# EAGLE board ClockGenerator (EAGLE 6.1)
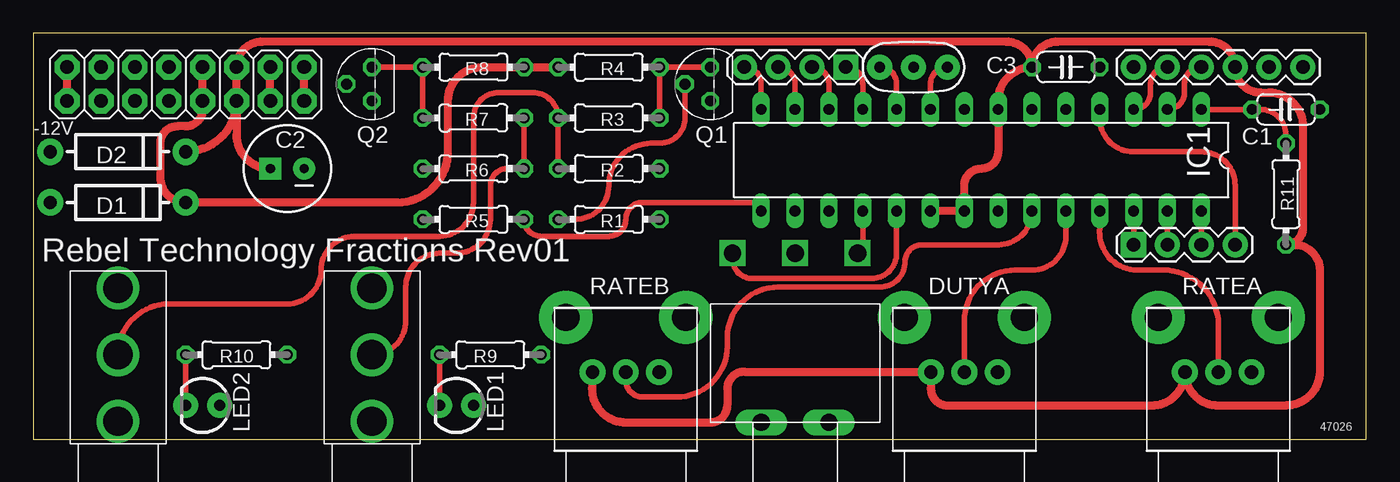
[diagram p0: board, top side]
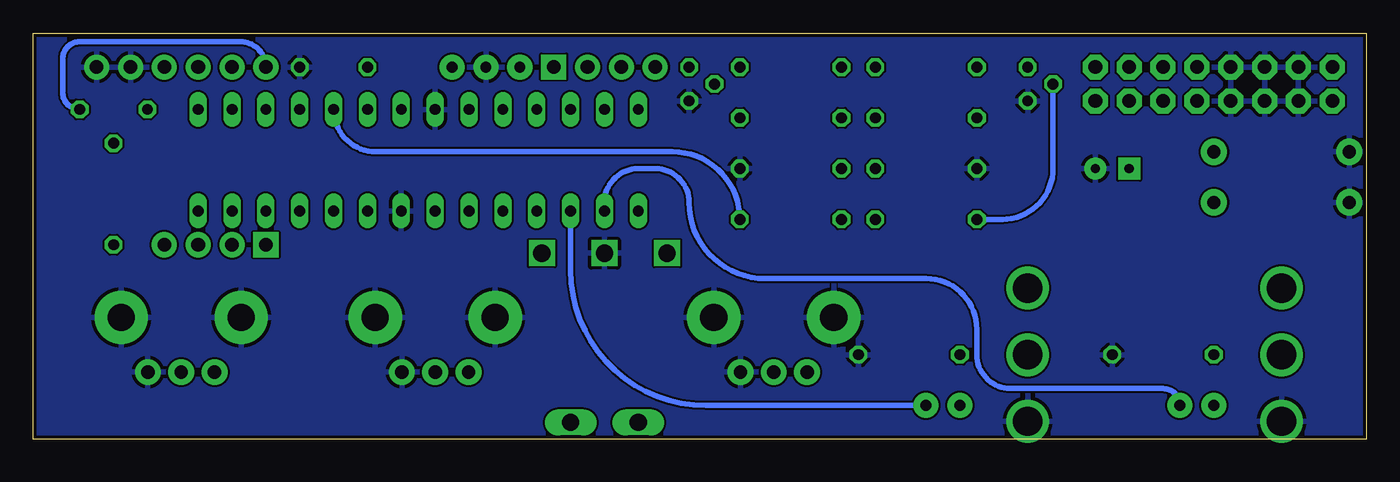
[diagram p1: board, bottom side, seen from below]

Size 100 x 30.48 mm. Coordinates in mm from the lower left corner, seen from the top.
Outline: 0,0 100,0 100,30.48 0,30.48 0,0
Copper layers (1*16): Top 0.035mm / dielectric 1.5mm / Bottom 0.035mm
Design rules: minimum track width 6mil, minimum drill 12mil, track to track 6mil, track to pad 6mil, pad to pad 6mil, via to via 6mil, smd to smd 0mil, copper to edge 10mil, drill to drill 10mil, minimum pad ring 10mil, minimum via ring 6mil, stop-mask expansion 2mil, vias tented up to drill 100mil, thermal gap 10mil

## Footprints (pad centres in the part's own frame; a part is rotated, then mirrored left to right if it is on the bottom)
C050-024X044 = drill 0.813 octagon: 1 -2.54,0; 2 2.54,0
CPOL-RADIAL-100UF-25V = drill 0.7 pad 1.651 square: 1 1.27,0 | drill 0.7 pad 1.651: 2 -1.27,0
DIODE-1N4001 = drill 1 pad 1.981: A -5.08,0; C 5.08,0
POT-ALPS_RK09L1120 = drill 1 pad 1.93: 1 -2.5,-0.036; 2 0,-0.036; 3 2.5,-0.036 | drill 2.032 pad 4: SHLD1 -4.5,4.064; SHLD2 4.5,4.064
DIL28-3 = drill 0.813 long: 1 -16.51,-3.81; 2 -13.97,-3.81; 3 -11.43,-3.81; 4 -8.89,-3.81; 5 -6.35,-3.81; 6 -3.81,-3.81; 7 -1.27,-3.81; 8 1.27,-3.81; 9 3.81,-3.81; 10 6.35,-3.81; 11 8.89,-3.81; 12 11.43,-3.81; 13 13.97,-3.81; 14 16.51,-3.81; 15 16.51,3.81; 16 13.97,3.81; 17 11.43,3.81; 18 8.89,3.81; 19 6.35,3.81; 20 3.81,3.81; 21 1.27,3.81; 22 -1.27,3.81; 23 -3.81,3.81; 24 -6.35,3.81; 25 -8.89,3.81; 26 -11.43,3.81; 27 -13.97,3.81; 28 -16.51,3.81
1X06 = drill 1.016 pad 1.88: 1 0,0; 2 2.54,0; 3 5.08,0; 4 7.62,0; 5 10.16,0; 6 12.7,0
1X04 = drill 1.016 pad 1.88 square: 1 0,0 | drill 1.016 pad 1.88: 2 2.54,0; 3 5.08,0; 4 7.62,0
LED3MM = drill 0.813 pad 1.88: A -1.27,0; K 1.27,0
UJ-3502-R = drill 2.2: P$1 0,0; P$2 0,5; P$3 0,-5
TO92 = drill 0.813 octagon: 1 1.27,0; 2 0,1.905; 3 -1.27,0
0204/7 = drill 0.813 octagon: 1 -3.81,0; 2 3.81,0
SWITCH-SPDT-SALECOM-T8020 = drill 1.3 square: 1 -4.699,0; 2 0,0; 3 4.699,0 | drill 1.3 long: SHIELD1 -2.54,-12.7; SHIELD2 2.54,-12.7
2X8 = drill 1.016 pad 1.88 octagon: 1 0,0; 2 0,2.54; 3 2.54,0; 4 2.54,2.54; 5 5.08,0; 6 5.08,2.54; 7 7.62,0; 8 7.62,2.54; 9 10.16,0; 10 10.16,2.54; 11 12.7,0; 12 12.7,2.54; 13 15.24,0; 14 15.24,2.54; 15 17.78,0; 16 17.78,2.54
RESONATOR-PTH = drill 0.8 pad 1.88: 1 -2.54,0; 2 0,0; 3 2.54,0

## Placement (x,y rotation side)
C1  100n  [C050-024X044]  93.98,24.77 180 top
C2  100u  [CPOL-RADIAL-100UF-25V]  19.05,20.32 180 top
C3  100n  [C050-024X044]  77.47,27.94 0 top
D1  [DIODE-1N4001]  6.35,17.78 0 top
D2  [DIODE-1N4001]  6.35,21.59 0 top
DUTYA  POT-ALPS_RK09L  [POT-ALPS_RK09L1120]  69.85,5.08 0 top
IC1  MEGA168  [DIL28-3]  71.12,20.95 180 top
JP1  [1X06]  95.25,27.94 180 top
JP2  [1X04]  60.96,27.94 180 top
JP3  [1X04]  82.55,14.61 0 top
LED1  [LED3MM]  31.75,2.54 180 top
LED2  [LED3MM]  12.7,2.54 180 top
OUTA  JACK-UJ-3502-R  [UJ-3502-R]  25.4,6.35 0 top
OUTB  JACK-UJ-3502-R  [UJ-3502-R]  6.35,6.35 0 top
Q1  2N3904  [TO92]  50.8,26.67 90 top
Q2  2N3904  [TO92]  25.4,26.67 90 top
R1  1K  [0204/7]  43.18,16.51 180 top
R2  1K  [0204/7]  43.18,20.32 180 top
R3  100  [0204/7]  43.18,24.13 180 top
R4  1K  [0204/7]  43.18,27.94 0 top
R5  1K  [0204/7]  33.02,16.51 180 top
R6  1K  [0204/7]  33.02,20.32 0 top
R7  100  [0204/7]  33.02,24.13 0 top
R8  1K  [0204/7]  33.02,27.94 180 top
R9  1K  [0204/7]  34.29,6.35 0 top
R10  1K  [0204/7]  15.24,6.35 0 top
R11  10K  [0204/7]  93.98,18.41 270 top
RATEA  POT-ALPS_RK09L  [POT-ALPS_RK09L1120]  88.9,5.08 0 top
RATEB  POT-ALPS_RK09L  [POT-ALPS_RK09L1120]  44.45,5.08 0 top
SW1  SWITCH-TOGGLE  [SWITCH-SPDT-SALECOM-T8020]  57.15,13.97 0 top
U$2  M08X2  [2X8]  2.54,25.4 0 top
Y1  16Mhz  [RESONATOR-PTH]  66.04,27.94 180 top

## Library data of the parts
C1 C3 R1-R11 = rcl
C2 D1 D2 JP1-JP3 LED1 LED2 U$2 Y1 = SparkFun
DUTYA OUTA OUTB RATEA RATEB SW1 = Rebel
IC1 = atmel; OC_FARNELL: unknown; OC_NEWARK: unknown
Q1 Q2 = transistor-npn

## Nets
+5V: C2.1 C3.1 D2.C DUTYA.1 IC1.7 IC1.20 IC1.21 JP1.3 R11.2 RATEA.1 RATEB.1 U$2.11 U$2.12
+12V: D1.C R4.1 R8.1 U$2.9 U$2.10
ADC0: IC1.23 RATEB.2
ADC1: DUTYA.2 IC1.24
ADC2: IC1.25 RATEA.2
GND: C2.2 C3.2 D1.A D2.A DUTYA.3 DUTYA.SHLD1 DUTYA.SHLD2 IC1.8 IC1.22 JP1.1 JP1.2 OUTA.P$3 OUTB.P$3 Q1.3 Q2.3 R2.1 R6.1 R9.2 R10.2 RATEA.3 RATEA.SHLD1 RATEA.SHLD2 RATEB.3 RATEB.SHLD1 RATEB.SHLD2 SW1.2 U$2.3 U$2.4 U$2.5 U$2.6 U$2.7 U$2.8 Y1.2
N$4: IC1.19 SW1.1
N$5: IC1.11 JP2.1
N$6: IC1.16 LED2.A
N$7: IC1.9 Y1.1
N$8: IC1.10 Y1.3
N$9: IC1.17 LED1.A
N$10: IC1.4 JP3.4
N$11: IC1.28 JP3.3
N$12: IC1.27 JP3.2
N$13: OUTB.P$1 R2.2 R3.2
N$14: Q1.1 R3.1 R4.2
N$15: IC1.26 JP3.1
N$16: IC1.12 JP2.2
N$17: IC1.13 JP2.3
N$18: U$2.13 U$2.14
N$19: IC1.14 JP2.4
N$20: IC1.18 SW1.3
N$21: Q1.2 R1.2
N$25: Q2.2 R5.2
N$26: OUTA.P$1 R6.2 R7.2
N$27: Q2.1 R7.1 R8.2
N$28: LED1.K R9.1
N$29: C1.1 JP1.6
N$30: LED2.K R10.1
N$31: C1.2 IC1.1 R11.1
OUTA: IC1.15 R5.1
OUTB: IC1.5 R1.1
PWR_BUS: U$2.15 U$2.16
RX: IC1.2 JP1.4
TX: IC1.3 JP1.5
V-: U$2.1 U$2.2

## Tracks (layer width: path | path; a pad name or v marks a point on that pad's centre or on a via)
+5V
  Top 0.61: IC1.20 IC1.21 69.85,19.05 arc-90 71.12,20.32 arc90 72.39,21.59 IC1.7 72.39,25.4 arc-90 C3.1 | U$2.11 U$2.12 arc-90 17.14,29.84 73.03,29.84 arc-90 C3.1 | 67.35,3.85 DUTYA.1 arc90 67.31,5.08 53.34,5.08 arc90 52.07,3.81 52.07,2.54 arc-90 50.8,1.27 44.45,1.27 arc-90 41.91,3.81 41.91,5 arc-90 RATEB.1 | 67.35,3.85 67.31,3.81 | U$2.11 arc-90 D2.C | C3.1 arc-90 76.83,29.84 88.27,29.84 arc-90 JP1.3 arc90 92.08,26.04 92.71,26.04 arc-90 95.25,23.5 95.25,15.88 arc-90 R11.2 94.61,14.61 arc-90 96.52,12.7 96.52,5.08 arc-90 93.98,2.54 88.9,2.54 arc-90 RATEA.1 RATEA.1 arc-90 83.9,2.54 68.58,2.54 arc-90 67.35,3.77 67.35,3.85 | U$2.11 15.24,22.86 arc90 C2.1
+12V
  Top 0.61: U$2.10 U$2.9 12.7,24.77 arc-90 11.43,23.5 10.79,23.5 arc90 9.53,22.23 9.53,19.68 arc90 D1.C 27.3,17.78 arc90 31.11,21.59 31.11,25.4 arc-90 33.66,27.94 R8.1 R4.1
ADC0
  Top 0.406: RATEB.2 44.45,4.45 arc90 45.72,3.17 48.26,3.17 arc90 52.07,6.99 52.07,7.62 arc-90 55.88,11.43 63.5,11.43 arc90 65.41,13.34 arc-90 66.67,14.61 72.39,14.61 arc90 IC1.23
ADC1
  Top 0.406: DUTYA.2 69.85,8.89 arc-90 73.66,12.7 74.93,12.7 arc90 77.47,15.24 IC1.24
ADC2
  Top 0.406: RATEA.2 88.9,8.26 arc90 85.09,12.7 82.55,12.7 arc-90 80.01,15.88 IC1.25
GND
  pour Bottom: 0,30.48 101.6,30.48 101.6,0 0,0
N$4
  Top 0.406: SW1.1 52.45,13.59 arc90 53.98,12.06 62.87,12.06 arc90 64.77,13.97 IC1.19
N$5
  Top 0.406: IC1.11 62.23,26.67 arc90 JP2.1
N$6
  Bottom 0.406: LED2.A arc-90 15.24,3.81 26.67,3.81 arc90 29.21,6.35 29.21,8.26 arc-90 33.02,12.06 45.09,12.06 arc90 50.8,17.78 arc-90 53.34,20.32 54.61,20.32 arc-90 57.15,17.78 IC1.16
N$7
  Top 0.406: IC1.9 67.31,26.67 arc-90 Y1.1
N$8
  Top 0.406: IC1.10 64.77,26.67 arc90 Y1.3
N$9
  Bottom 0.406: LED1.A 49.53,2.54 arc90 59.69,12.7 IC1.17
N$10
  Top 0.406: JP3.4 90.17,19.05 arc90 87.63,21.59 82.55,21.59 arc-90 80.01,24.13 IC1.4
N$11
  Top 0.406: JP3.3 IC1.28
N$12
  Top 0.406: JP3.2 IC1.27
N$13
  Top 0.406: R2.2 R3.2 arc90 37.47,26.04 34.92,26.04 arc90 33.02,24.13 33.02,17.78 arc-90 30.48,15.24 24.13,15.24 arc90 21.59,12.7 arc-90 19.05,10.16 10.16,10.16 arc90 OUTB.P$1
N$14
  Top 0.406: Q1.1 R4.2 R3.1
N$15
  Top 0.406: JP3.1 IC1.26
N$16
  Top 0.406: IC1.12 59.69,26.67 arc90 JP2.2
N$17
  Top 0.406: IC1.13 57.15,26.67 arc90 JP2.3
N$18
  Top 0.61: U$2.13 U$2.14
N$19
  Top 0.406: IC1.14 54.61,26.67 arc90 JP2.4
N$20
  Top 0.406: IC1.18 62.23,14.35 arc-90 SW1.3
N$21
  Top 0.406: R1.2 40.64,16.51 arc90 43.18,19.05 arc-90 46.35,22.23 46.99,22.23 arc90 48.9,24.13 Q1.2
N$25
  Bottom 0.406: R5.2 27.3,16.51 arc-90 23.5,20.32 Q2.2
N$26
  Top 0.406: R7.2 R6.2 35.56,20.32 arc90 34.29,19.05 34.29,16.51 arc-90 31.75,13.97 30.48,13.97 arc90 27.94,11.43 27.94,8.89 arc-90 OUTA.P$1
N$27
  Top 0.406: Q2.1 R8.2 R7.1
N$28
  Top 0.406: LED1.K R9.1
N$29
  Bottom 0.406: C1.1 arc90 97.79,26.04 97.79,28.57 arc90 96.52,29.84 84.45,29.84 arc90 JP1.6
N$30
  Top 0.406: LED2.K R10.1
N$31
  Top 0.406: IC1.1 C1.2 92.08,24.77 arc-90 93.98,22.86 R11.1
OUTA
  Top 0.406: R5.1 arc90 38.1,15.24 43.18,15.24 arc90 44.45,16.51 arc-90 45.72,17.78 53.98,17.78 arc-90 IC1.15
OUTB
  Bottom 0.406: R1.1 arc-90 52.07,21.59 74.3,21.59 arc90 IC1.5
PWR_BUS
  Top 0.61: U$2.15 U$2.16
RX
  Top 0.406: IC1.2 arc90 86.36,26.04 86.36,26.67 arc-90 JP1.4
TX
  Top 0.406: JP1.5 arc90 83.82,26.67 83.82,26.04 arc-90 IC1.3
V-
  Top 0.61: U$2.1 U$2.2

## Text on the board
tPlace: -12V | Rebel Technology Fractions Rev01 | 47026